# Altium PCB 5V_Reg.PcbDoc
Units mm, origin at the board's own origin, x right, y up, seen from the top; angles counter-clockwise.
Board outline 39.5 x 28 mm, 2 copper layers (Top Layer, Bottom Layer); 11 components, 5 nets, 27 pads, 0 vias.
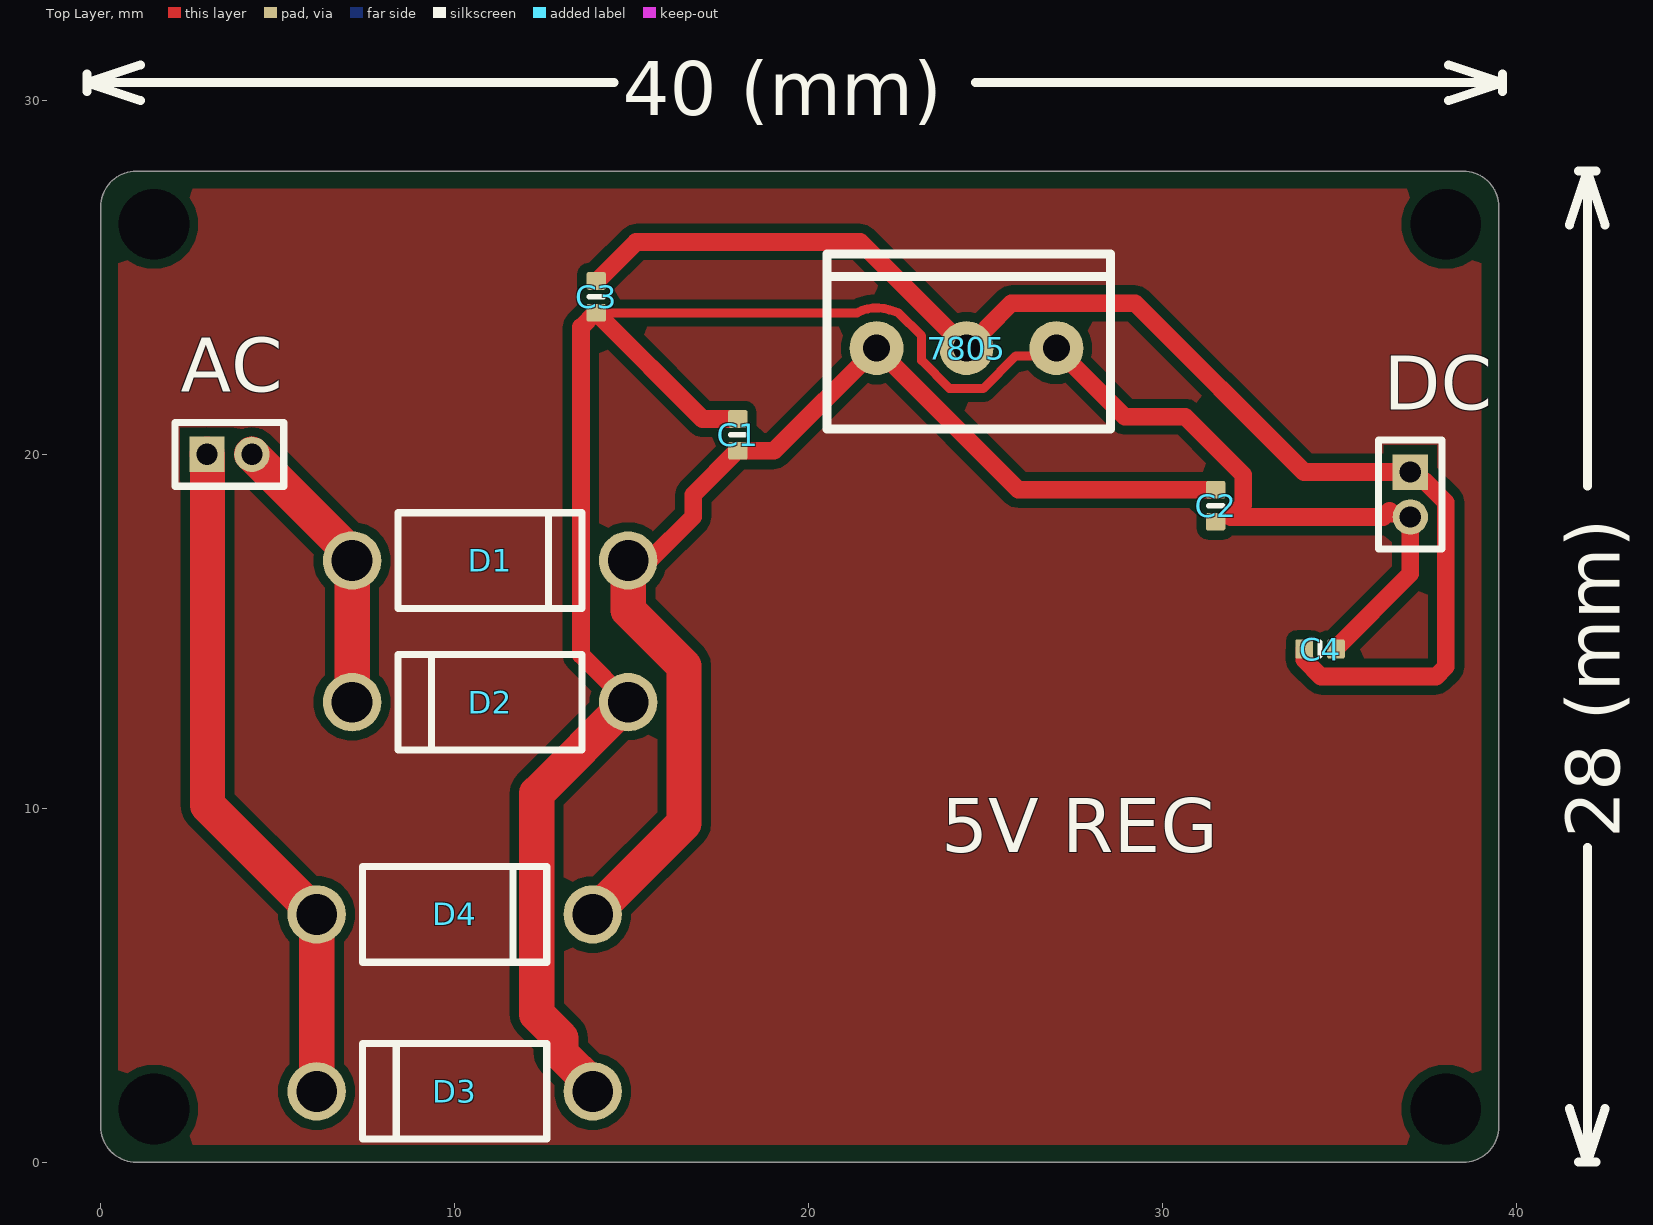
[diagram p0: Top Layer view]
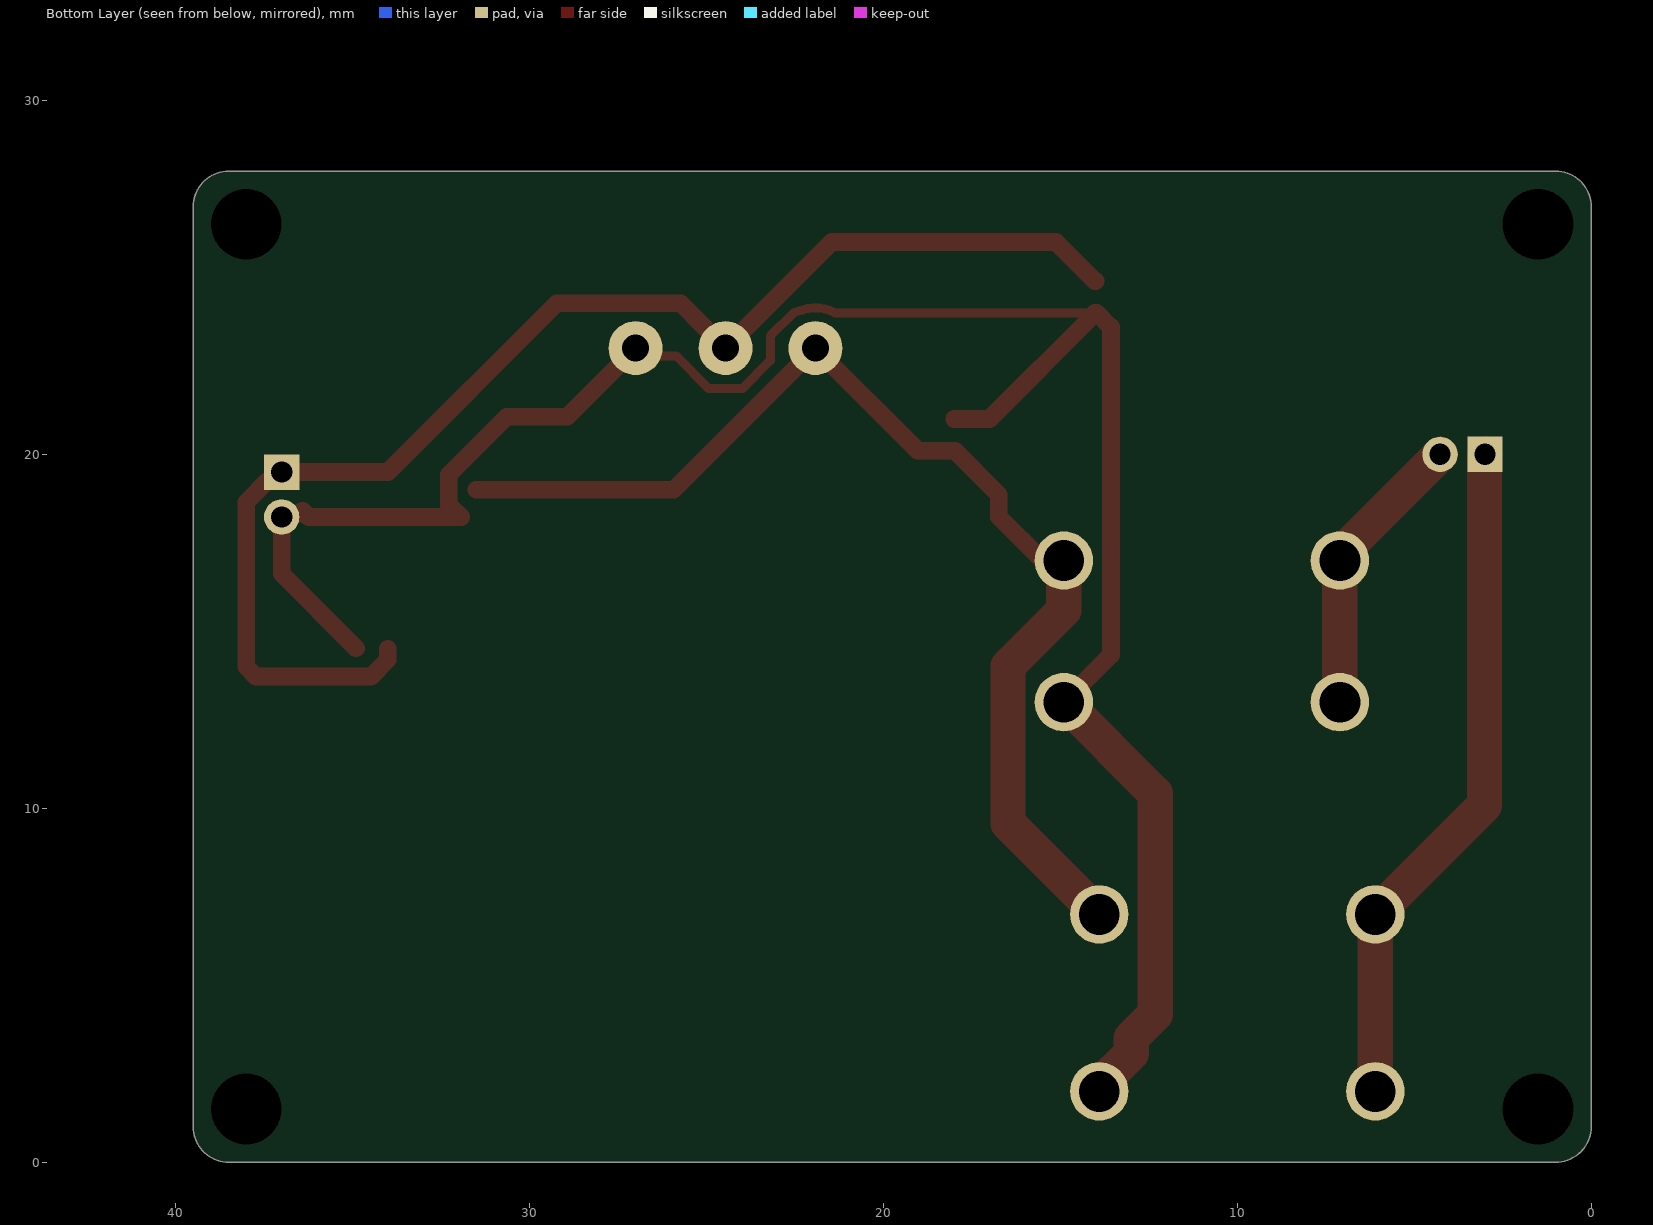
[diagram p1: Bottom Layer view, seen from below]

## Layer stack, top to bottom
Top Solder: solder mask 0.0102, Solder Resist, Dk 3.5
Top Layer: signal copper 0.0356
Dielectric 1: dielectric 0.32, FR-4, Dk 4.8
Bottom Layer: signal copper 0.0356
Bottom Solder: solder mask 0.0102, Solder Resist, Dk 3.5

## Board outline
0,1 ccw(c1,1) 1,0 38.5,0 ccw(c38.5,1) 39.5,1 39.5,27 ccw(c38.5,27) 38.5,28 1,28 ccw(c1,27) 0,27

## Design rules (kind name [scope] priority, off if disabled: settings)
AssemblyTestPointUsage [All] p1: isadvanced=TRUE
AssemblyTestpoint [All] p1: isadvanced=TRUE testpointundercomponent=TRUE minsize=1.016 maxsize=2.54 preferedsize=1.524 minholesize=0 maxholesize=1.016 preferedholesize=0.813 testpointgrid=0.025 usegrid=TRUE gridtolerance=0 allowsidetop=TRUE allowsidebottom=TRUE
Clearance Clearance_8 [InNamedPolygon('NONET_L01_P000')] p1: gap=0.254 ignorepadtopadclearanceinfootprint=FALSE
Clearance Clearance_7 [InNamedPolygon('NONET_L01_P000')] p2: gap=0.254 ignorepadtopadclearanceinfootprint=FALSE
Clearance Clearance_6 [InNamedPolygon('NONET_L01_P000')] p3: gap=0.254 ignorepadtopadclearanceinfootprint=FALSE
Clearance Clearance_5 [InNamedPolygon('NONET_L01_P000')] p4: isadvanced=TRUE gap=0.254 ignorepadtopadclearanceinfootprint=FALSE
Clearance Clearance_4 [InNamedPolygon('NONET_L01_P000')] p5: isadvanced=TRUE gap=0.254 ignorepadtopadclearanceinfootprint=FALSE
Clearance Clearance_3 [InNamedPolygon('NONET_L01_P000')] p6: isadvanced=TRUE gap=0.254 ignorepadtopadclearanceinfootprint=FALSE
Clearance Clearance_2 [InNamedPolygon('NONET_L01_P000')] p7: isadvanced=TRUE gap=0.254 ignorepadtopadclearanceinfootprint=FALSE
Clearance Clearance_1 [InNamedPolygon('NONET_L01_P000')] p8: isadvanced=TRUE gap=0.254 ignorepadtopadclearanceinfootprint=FALSE
Clearance Clearance_1 [OnMid vs OnMid] p9: gap=1 ignorepadtopadclearanceinfootprint=FALSE except(0.254: SMDPad-SMDPad SMDPad-THPad SMDPad-Via SMDPad-Fill SMDPad-Poly SMDPad-Region SMDPad-Hole Via-Via Via-Fill Via-Poly Via-Region Via-Hole Fill-Fill Fill-Poly Fill-Region Fill-Hole Poly-Poly Poly-Region Poly-Hole Region-Region Region-Hole Hole-Hole) sourcerule=46 cellrowname=All cellrowtype=0 cellcolname=All cellcoltype=0 innerlayers=TRUE
Clearance Clearance_2 [(ExistsOnLayer('Top Layer') Or ExistsOnLayer('Bottom Layer')) vs (ExistsOnLayer('Top Layer') Or ExistsOnLayer('Bottom Layer'))] p10: gap=1 ignorepadtopadclearanceinfootprint=FALSE except(0.254: SMDPad-SMDPad SMDPad-THPad SMDPad-Via SMDPad-Fill SMDPad-Poly SMDPad-Region SMDPad-Hole Via-Via Via-Fill Via-Poly Via-Region Via-Hole Fill-Fill Fill-Poly Fill-Region Fill-Hole Poly-Poly Poly-Region Poly-Hole Region-Region Region-Hole Hole-Hole) sourcerule=46 cellrowname=All cellrowtype=0 cellcolname=All cellcoltype=0 outerlayers=TRUE
Clearance [All] p11: gap=0.254 ignorepadtopadclearanceinfootprint=FALSE ismatrix=TRUE
ComponentClearance [All] p1: isadvanced=TRUE gap=0.254 collisioncheckmode=3 verticalgap=0.254 showdistances=FALSE
FabricationTestPointUsage [All] p1: isadvanced=TRUE valid=0 allowmultiple=FALSE
FabricationTestpoint [All] p1: isadvanced=TRUE side=3 testpointundercomponent=TRUE minsize=1.016 maxsize=2.54 preferedsize=1.524 minholesize=0 maxholesize=1.016 preferedholesize=0.813 testpointgrid=0.025 allowsidetop=TRUE allowsidebottom=TRUE usegrid=TRUE gridtolerance=0
FanoutControl Fanout_BGA [IsBGA] p1: isadvanced=TRUE bgadir=Out bgaviamode=Centered fanoutstyle=Auto fanoutdirection=Alternating viagrid=0.025 // Fanout_BGA (Default Rule)
FanoutControl Fanout_LCC [IsLCC] p2: isadvanced=TRUE bgadir=Out bgaviamode=Centered fanoutstyle=Auto fanoutdirection=Alternating viagrid=0.025 // Fanout_LCC (Default Rule)
FanoutControl Fanout_SOIC [IsSOIC] p3: isadvanced=TRUE bgadir=Out bgaviamode=Centered fanoutstyle=Auto fanoutdirection=Alternating viagrid=0.025 // Fanout_SOIC (Default Rule)
FanoutControl Fanout_Small [(CompPinCount < 5)] p4: isadvanced=TRUE bgadir=Out bgaviamode=Centered fanoutstyle=Auto fanoutdirection=OutThenIn viagrid=0.025 // Fanout_Small (Default Rule)
FanoutControl Fanout_Default [All] p5: isadvanced=TRUE bgadir=Out bgaviamode=Centered fanoutstyle=Auto fanoutdirection=Alternating viagrid=0.025 // Fanout_Default (Default Rule)
Height [All] p1: isadvanced=TRUE minheight=0 maxheight=25.4 prefheight=12.7
HoleSize [All] p1: isadvanced=TRUE absolutevalues=TRUE maxlimit=2.54 minlimit=0.025 maxpercent=80.000 minpercent=20.000
HoleToHoleClearance [All] p1: isadvanced=TRUE gap=0.254 allowstackedmicrovias=TRUE
LayerPairs [All] p1: isadvanced=TRUE enforce=TRUE
MinimumSolderMaskSliver [All] p1: isadvanced=TRUE minsoldermaskwidth=0.254
NetAntennae [All] p1: isadvanced=TRUE netantennaetolerance=0
PasteMaskExpansion [All] p1: isadvanced=TRUE expansion=0
PlaneClearance [All] p1: isadvanced=TRUE clearance=0.508
PlaneConnect [All] p1: isadvanced=TRUE planeconnectstyle=Relief reliefexpansion=0.508 reliefentries=4 reliefconductorwidth=0.254 reliefairgap=0.254
PolygonConnect PolygonConnect_2 [All vs IsNamedPolygon('NONET_L01_P000')] p1: connectstyle=Relief reliefconductorwidth=0.254 reliefentries=4 polygonreliefangle="90 Angle" airgapwidth=0.254
PolygonConnect PolygonConnect_1 [All vs IsNamedPolygon('NONET_L01_P000')] p2: connectstyle=Relief reliefconductorwidth=0.254 reliefentries=4 polygonreliefangle="90 Angle" airgapwidth=0.254
PolygonConnect [All] p3: connectstyle=Relief reliefconductorwidth=0.254 reliefentries=4 polygonreliefangle="90 Angle" airgapwidth=0.254
RoutingCorners [All] p1: isadvanced=TRUE cornerstyle=45-Degree minsetback=2.54 maxsetback=2.54
RoutingPriority [All] p1: isadvanced=TRUE routingpriority=0
RoutingVias [All] p1: holewidth=0.711 width=1.27 viastyle="Through Hole" minholewidth=0.711 minwidth=1.27 maxholewidth=0.711 maxwidth=1.27
ShortCircuit [All] p1: isadvanced=TRUE allowed=FALSE
SilkToSilkClearance [All] p1: isadvanced=TRUE silktosilkclearance=0.254
SilkToSolderMaskClearance [IsPad] p1: isadvanced=TRUE minsilkscreentomaskgap=0.254 clearancetoexposedcopper=TRUE
SolderMaskExpansion [All] p1: isadvanced=TRUE expansion=0.102 istentingtop=FALSE
UnRoutedNet [All] p1: isadvanced=TRUE
UnpouredPolygon [All] p1: isadvanced=TRUE
Width [All] p1: maxlimit=2 minlimit=0.254 preferedwidth=1 minimp=50.000000 maximp=50.000000 favimp=50.000000
4 further rules are at their usual default settings.

## Components (designator, comment, footprint, x,y, rotation, side; value= is the part's Value field where it differs from the comment)
7805 "VOLT REG" PCBComponent_1 21.92,23 r0 top
AC "AC" MHDR1X2 3,20 r0 top (schematic designator CN1)
C1 "Capacitor 100nF +/-20% 50V 0402" CAPC0402(1005)60_L 18,20.55 r270 top value=100nF
C2 "Capacitor 100nF +/-20% 50V 0402" CAPC0402(1005)60_L 31.5,18.55 r90 top value=2200/25V
C3 "Capacitor 100nF +/-20% 50V 0402" CAPC0402(1005)60_L 14,24.45 r90 top value=2200/25V
C4 "Capacitor 100nF +/-20% 50V 0402" CAPC0402(1005)60_L 34.45,14.5 r180 top value=100nF
D1 "1N4004" FAIR-DO-41-2 11,17 r0 top
D2 "1N4004" FAIR-DO-41-2 11,13 r180 top
D3 "1N4004" FAIR-DO-41-2 10,2 r180 top
D4 "1N4004" FAIR-DO-41-2 10,7 r0 top
DC "DC" MHDR1X2 37,19.5 r270 top (schematic designator CN2)

## Footprints (in the part's own frame and the unit in brackets; to place one, negate y for a bottom-side part, rotate by r counter-clockwise, add the part's x,y. Pads: shape width x height; smd on the part's side, far side on the other; paste and mask are expansions set on the pad)
CAPC0402(1005)60_L [mm] "Chip Capacitor, Body 1.0x0.5mm, Height 0.6mm, IPC High Density"
  rrect25% 0.5x0.55 smd: 1(-0.45,0) 2(0.45,0)
  silkscreen extent 0,-0.2 0,0.2, body extent -0.5,-0.25 0.5,0.25, height 0.6
FAIR-DO-41-2 [mm] "THD, 2-Leads, Body 5.2x2.72mm, Pin Spacing 7.8mm"
  round 1.65 hole 1.15: 1(-3.9,0) 2(3.9,0)
  silkscreen extent -2.6,-1.35 2.6,1.35, body extent -4.29,-1.17 4.29,1.17, height 2.35
MHDR1X2 [mm] "Connector; Header; 2 Position"
  rect 1x1 hole 0.6: 1(0,0)
  round 1 hole 0.6: 2(1.27,0)
  silkscreen extent -0.9,-0.9 2.17,0.9
PCBComponent_1 [mil]
  round 60 hole 30: 1(0,0) 2(200,0) 3(100,0)
  silkscreen extent -55,-90 260,105

## Part data
AC DC: library part CMP-002-00208-1, "Header, 2-Pin", Component Type=Standard, Design Item ID=MHDR1X2, LatestRevisionDate=17-Jul-2002, LatestRevisionNote="Re-released for DXP Platform.", Pins=2, Publisher="Altium Limited", Source="Miscellaneous Connectors.SchLib"
C1 C2 C3 C4: library part CMP-001-00067-3, "Chip Capacitor, 100nF +/-20%, 50V, 0402, Thickness 0.6 mm", Case/Package=0402, Max Operating Temperature=85°C, Min Operating Temperature=-55°C, Tolerance=10%, Voltage Rating=50V, Mounting Technology=SMT, Pins=2
D1 D2 D3 D4: library part CMP-004-00004-2, "General Purpose Rectifier, 400 V, 1 A, -55 to 175 degC, 2-Pin DO-204AL (DO-41), RoHS, Tape and Reel", Case/Package=DO-41-2, Forward Current=1A, Forward Voltage=1.1V, Manufacturer="Fairchild Semiconductor", Max Operating Temperature=175°C, Max Surge Current=30A, Min Operating Temperature=-55°C, Package Description="2-Pin Axial Lead, Dia 2.375 mm, Body Length 4.63 mm", Package Quantity=5000, Package Version="Rev. 2, 09/2008", Peak Reverse Current=50A, Datasheet URL=https://www.fairchildsemi.com/datasheets/1N/1N4004.pdf, Datasheet Version="Rev. 1.1.0, 11/2014", Diameter=2.72mm, Manufacturer URL=https://www.fairchildsemi.com/, Mounting Technology=TH, Package Reference=DO-41-2, Package URL=http://www.fairchildsemi.com/dwg/DO/DO41A.pdf, Packaging=TapeandReel, Pins=2, RoHS Compliant=True

## Free pads (board coordinates)
  round 1.524 hole 2: 1(1.5,26.5) 2(38,26.5) 3(1.5,1.5) 4(38,1.5)

## Nets (pads, with @x,y where several pads share a name; then routed paths per layer and width w, separated by ;. In a path a pad name is that pad's centre, name@x,y a point inside that pad or via, vN(x,y) a via of type N, cw(c..) or ccw(c..) an arc to the next point about the centre after c; other vN are vias at no path point)
Net7805_1: 7805.1 C1.2 C2.2 D1.2 D4.2 | length 33.5
  Top Layer w0.254: D1.2 15,17.1 15,17.431 D1.2@15,17.5
  Top Layer w0.5: D1.2@15,17.431 15.153,17.278 15.166,17.266 15.431,17 15.5,17 16.738,18.237 16.738,18.863 17.975,20.1 C1.2 19.02,20.1 7805.1 25.92,19 C2.2
  Top Layer w1: D4.2 16.479,9.579 16.479,14.021 14.9,15.6 D1.2
Net7805_2: 7805.2 C1.1 C2.1 C3.1 C4.1 D2.1 D3.1 DC.2 | length 62.4
  Top Layer w0.254: C3.1 14.025,24 21.366,24 cw(c21.92,23) 22.281,24.084 22.536,24 23.19,23.346 23.19,22.654 23.987,21.857 24.933,21.857 25.857,22.781 26.781,22.781 7805.2 ; C4.1 C4.1@34.9,14.525
  Top Layer w0.5: C3.1 13.975,24 13.571,23.596 13.571,14.329 D2.1 ; C3.1@14.025,24 14.025,23.975 17,21 C1.1 ; 7805.2 28.936,21.064 30.637,21.064 32.279,19.422 32.279,18.578 31.931,18.23 36.234,18.23 36.41,18.406 36.49,18.326 36.904,18.326 DC.2 37,16.625 C4.1@34.9,14.525
  Top Layer w1: D3.1 13.9,2.176 13,3.076 13,3.5 12.321,4.179 12.321,10.421 D2.1
Net7805_3: 7805.3 C3.2 C4.2 DC.1 | length 37.8
  Top Layer w0.254: 7805.3 25.031,23.571
  Top Layer w0.5: C3.2 14.025,24.9 15.125,26 21.46,26 7805.3 ; 25.031,23.571 25.726,24.266 29.23,24.266 33.996,19.5 DC.1 37.25,19.25 37.4,19.25 38.004,18.646 38.004,14 37.725,13.721 34.478,13.721 34,14.199 C4.2
NetCN1_1: AC.1 D3.2 D4.1 | length 19.3
  Top Layer w1: AC.1 3.016,19.984 3.016,10.084 D4.1 D3.2
NetCN1_2: AC.2 D1.1 D2.2 | length 8.2
  Top Layer w1: AC.2 7.1,17.17 D1.1 D2.2

## Polygon pours and split planes (outlines as drawn)
no net on Top Layer "NONET_L01_P000" (solid, pour order 0): 0.5,27.5 39,27.5 39,0.5 0.5,0.5

## Silkscreen, mask and mechanical layers (free items; w line width, h text height)
Top Overlay:
  lines w0.254: -0.396,30.246 -0.396,30.754 ; 1.128,29.992 -0.396,30.5 ; 1.128,31.008 -0.396,30.5 ; 14.5,30.5 -0.396,30.5 ; 24.708,30.5 39.604,30.5 ; 38.08,29.992 39.604,30.5 ; 38.08,31.008 39.604,30.5 ; 39.604,30.246 39.604,30.754 ; 41.492,1.524 42,0 ; 41.492,26.476 42,28 ; 41.746,0 42.254,0 ; 41.746,28 42.254,28 ; 42,8.896 42,0 ; 42,19.104 42,28 ; 42.508,1.524 42,0 ; 42.508,26.476 42,28
  text "40 (mm)" at 14.754,29.586 h1.52
  text "28 (mm)" at 42.914,9.15 h1.52 r90
  text "5V REG" at 23.754,8.754 h1.52
Mechanical 1:
  the board outline again, w0.254